# Altium PCB PCB.pcbdoc
Units mil, origin at the board's own origin, x right, y up, seen from the top; angles counter-clockwise.
Board outline 4573.5 x 6371.77 mil, 2 copper layers (Top Layer, Bottom Layer); 48 components, 32 nets, 161 pads, 63 vias.
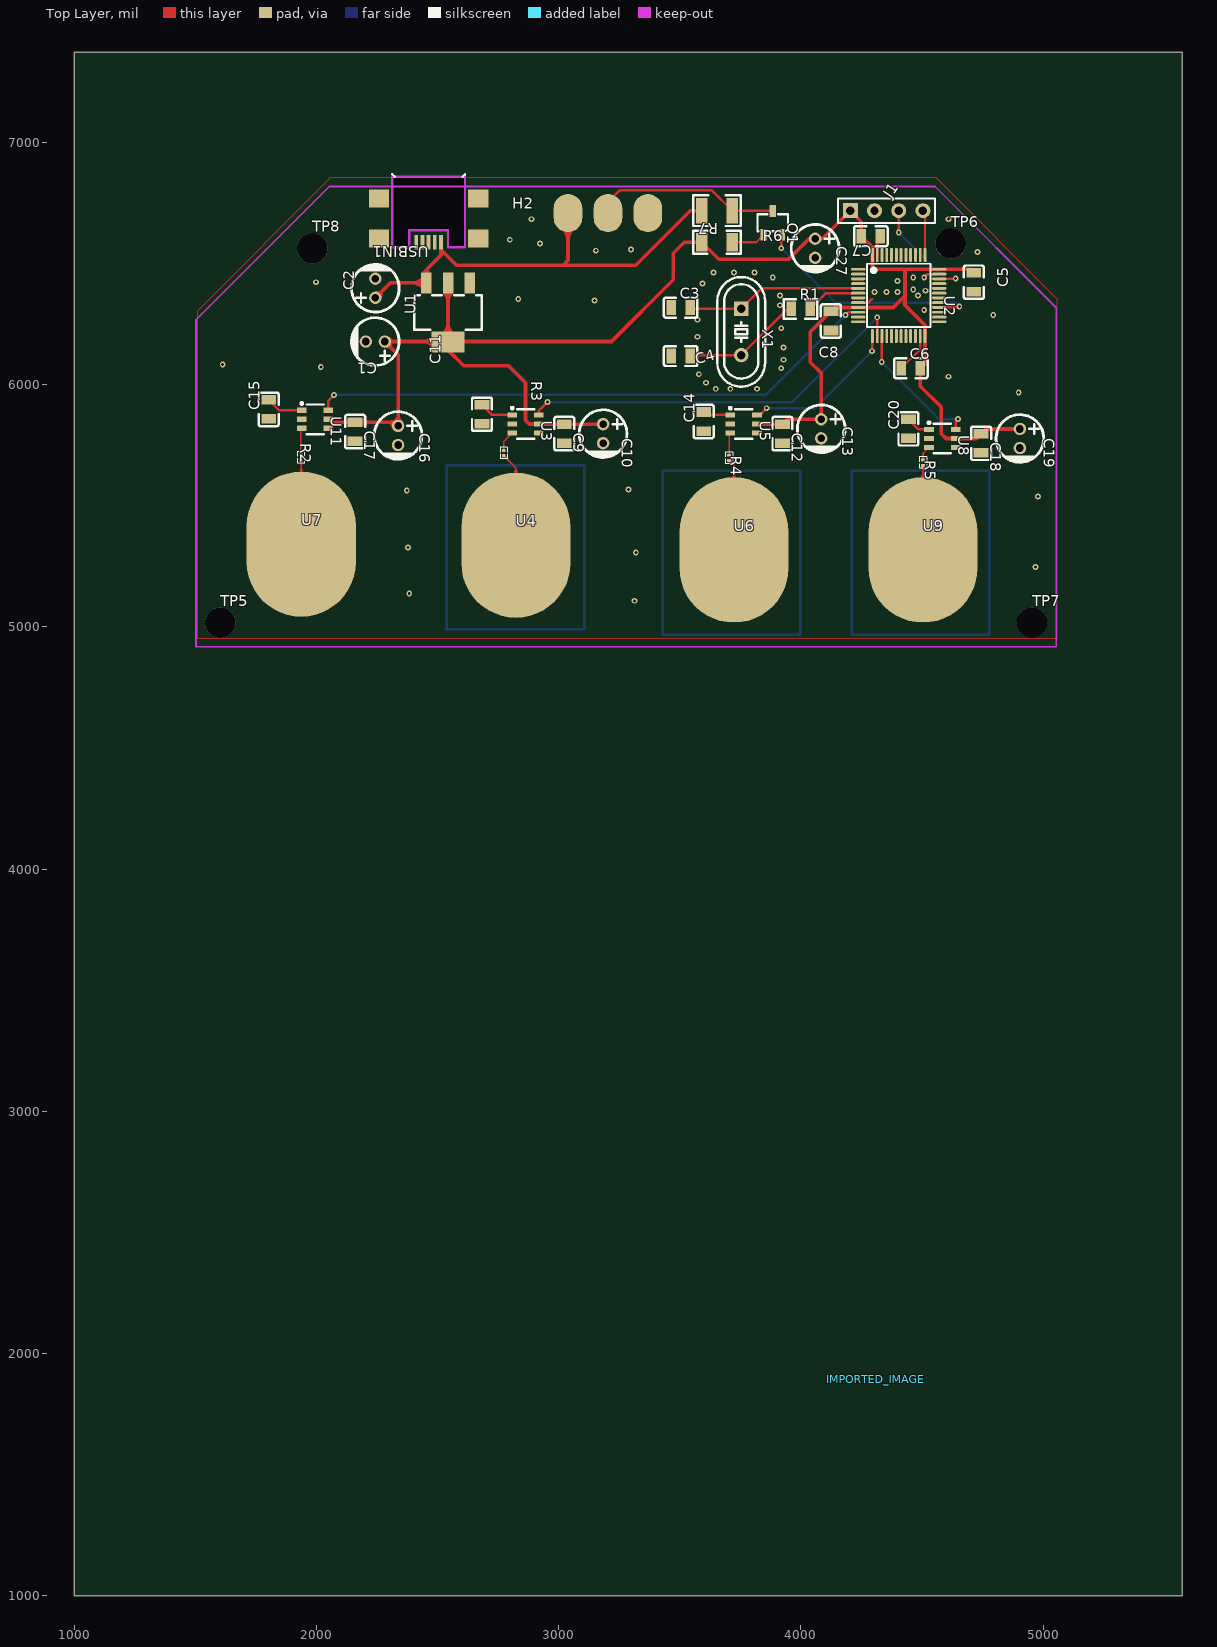
[diagram p0: Top Layer view]
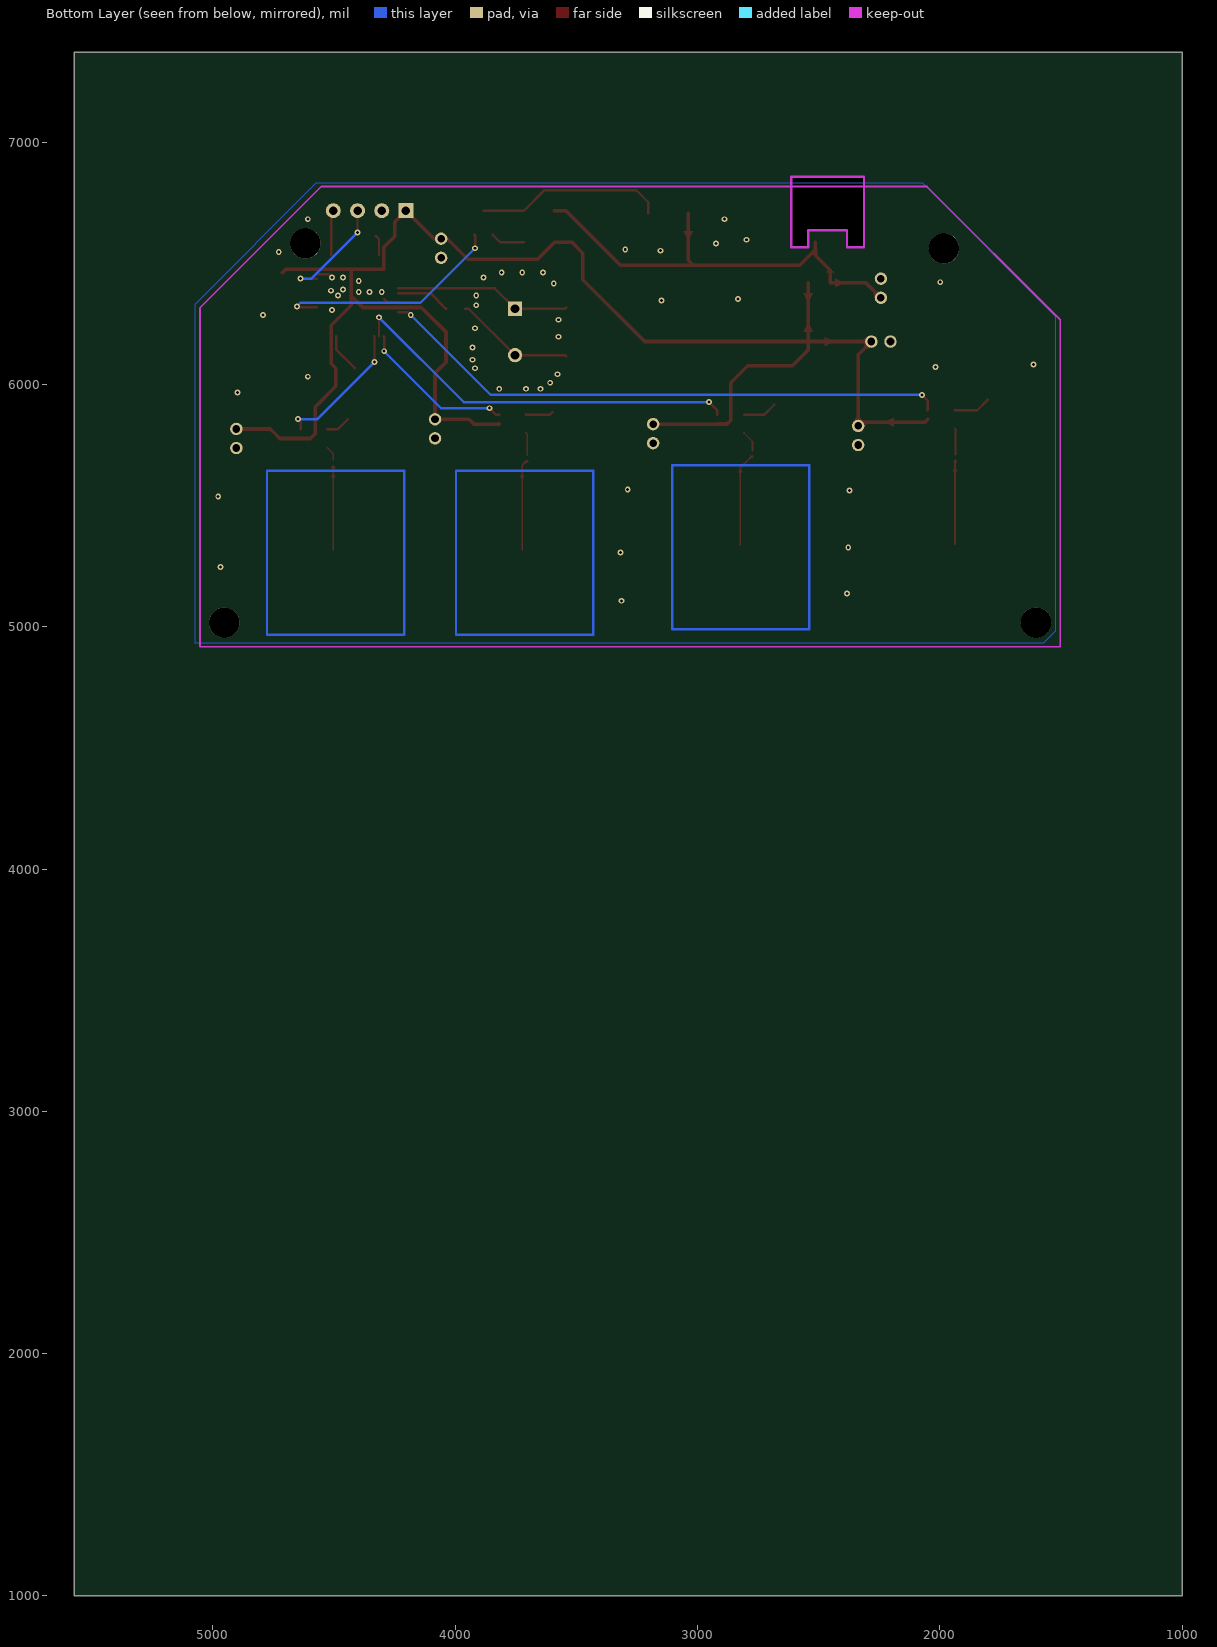
[diagram p1: Bottom Layer view, seen from below]

## Layer stack, top to bottom
Top Layer: signal copper (thickness not stored)
Dielectric: dielectric 12.6, FR-4, Dk 4.8
Bottom Layer: signal copper (thickness not stored)

## Board outline
5573.5,1000 1000,1000 1000,7371.77 5573.5,7371.77

## Components (designator, comment, footprint, x,y, rotation, side; value= is the part's Value field where it differs from the comment)
C1 "22uF" CAP-TH_BD5.0-P2.00-D0.8-FD 2243.5,6176.84 r180 top
C2 "10uF" CAP-TH_BD5.0-P2.00-D0.8-FD 2243.5,6396.84 r90 top
C3 "22pF" C0805 3503.5,6316.84 r0 top
C4 "22pF" C0805 3503.5,6116.84 r0 top
C5 "100nf" C0805 4713.5,6421.84 r90 top
C6 "100nf" C0805 4453.5,6066.84 r0 top
C7 "100nf" C0805 4288.5,6611.84 r180 top
C8 "100nf" C0805 4123.5,6261.84 r90 top
C9 "0.1u" C0805 3023.5,5796.84 r270 top
C10 "10uF" CAP-TH_BD5.0-P2.00-D0.8-FD 3183.5,5796.84 r270 top
C11 "47nf" C0805 2683.5,5876.84 r90 top
C12 "0.1u" C0805 3923.5,5796.84 r270 top
C13 "10uF" CAP-TH_BD5.0-P2.00-D0.8-FD 4083.5,5816.84 r270 top
C14 "47nf" C0805 3598.5,5846.84 r90 top
C15 "47nf" C0805 1803.5,5896.84 r90 top
C16 "10uF" CAP-TH_BD5.0-P2.00-D0.8-FD 2337.36,5789.27 r270 top
C17 "0.1u" C0805 2160.19,5805.02 r270 top
C18 "0.1u" C0805 4743.5,5756.84 r270 top
C19 "10uF" CAP-TH_BD5.0-P2.00-D0.8-FD 4903.5,5776.84 r270 top
C20 "47nf" C0805 4443.5,5816.84 r90 top
C27 "22uF" CAP-TH_BD5.0-P2.00-D0.8-FD 4058.5,6561.84 r270 top
H2 "HDR-F-2.54_1x3" 灯条接口 3203.5,6711.84 r0 top
IMPORTED_IMAGE "IMPORTED_IMAGE" IMPORTED_IMAGE 4308.16,1893.65 r0 top
J1 "HDR-M-2.54_1x4" HDR-M-2.54_1X4 4353.5,6716.84 r0 top
Q1 "2SC2412G" SOT-23-3_L3.0-W1.7-P0.95-LS2.9-BR 3883.5,6666.84 r270 top
R1 "390" R0805 3998.5,6311.84 r0 top
R2 "5K" R0201 1935.78,5698.72 r270 top
R3 "5K" R0201 2773.5,5716.84 r270 top
R4 "5K" R0201 3703.5,5696.84 r270 top
R5 "5K" R0201 4503.5,5676.84 r270 top
R6 "13K" R1206 3653.5,6586.84 r0 top
R7 "20K" R1210 3653.5,6716.84 r180 top
TP5 "M3铜柱" M3铜柱 1603.5,5016.84 r0 top
TP6 "M3铜柱" M3铜柱 4618.5,6581.84 r0 top
TP7 "M3铜柱" M3铜柱 4953.5,5016.84 r0 top
TP8 "M3铜柱" M3铜柱 1983.5,6561.84 r0 top
U1 "AMS1117_C400139" SOT-223-3_L6.5-W3.4-P2.30-LS7.0-BR 2543.5,6296.84 r90 top
U2 "MM32F103C8T6" LQFP-48_L7.0-W7.0-P0.50-LS9.0-BL 4403.5,6366.84 r270 top
U3 "RH6016CB" SOT-23-6_L2.9-W1.6-P0.95-LS2.8-BL 2863.5,5836.84 r270 top
U4 "触摸电极" 触摸电极 2823.5,5336.84 r0 top
U5 "RH6016CB" SOT-23-6_L2.9-W1.6-P0.95-LS2.8-BL 3763.5,5836.84 r270 top
U6 "触摸电极" 触摸电极 3723.5,5316.84 r0 top
U7 "触摸电极" 触摸电极 1937.83,5340.77 r0 top
U8 "RH6016CB" SOT-23-6_L2.9-W1.6-P0.95-LS2.8-BL 4583.5,5776.84 r270 top
U9 "触摸电极" 触摸电极 4503.5,5316.84 r0 top
U11 "RH6016CB" SOT-23-6_L2.9-W1.6-P0.95-LS2.8-BL 1994.84,5856.2 r270 top
USBIN1 "USB-Micro_2" MICRO-USB-SMD_5P_C40957 2463.5,6676.84 r180 top
X1 "8MHz" HC-49US_L11.5-W4.5-P4.88 3753.5,6216.84 r270 top

## Footprints (in the part's own frame and the unit in brackets; to place one, negate y for a bottom-side part, rotate by r counter-clockwise, add the part's x,y. Pads: shape width x height; smd on the part's side, far side on the other; paste and mask are expansions set on the pad)
C0805 [mm]
  rect 1x1.55 smd: 1(-1,0) 2(1,0)
  silkscreen extent -1.75,-1.04 1.75,1.04
CAP-TH_BD5.0-P2.00-D0.8-FD [mm]
  round 1.3 hole 0.8: 1(-1,0) 2(1,0)
  silkscreen extent -2.5,-2.5 2.5,2.5
HC-49US_L11.5-W4.5-P4.88 [mm]
  rect 1.5x1.5 hole 0.9: 1(-2.438,0)
  round 1.5 hole 0.9: 2(2.438,0)
  silkscreen extent -5.74,-2.5 5.74,2.5
HDR-M-2.54_1X4 [mil]
  rect 62x62 hole 35: 1(-150,0)
  round 62 hole 35: 2(-50,0) 3(50,0) 4(150,0)
  silkscreen extent -200,-50 200,50
IMPORTED_IMAGE [mil]
LQFP-48_L7.0-W7.0-P0.50-LS9.0-BL [mm]
  oval 0.3x1.5 smd: 1(-2.75,-4.25) 2(-2.25,-4.25) 3(-1.75,-4.25) 4(-1.25,-4.25) 5(-0.75,-4.25) 6(-0.25,-4.25) 7(0.25,-4.25) 8(0.75,-4.25) 9(1.25,-4.25) 10(1.75,-4.25) 11(2.25,-4.25) 12(2.75,-4.25) 25(2.75,4.25) 26(2.25,4.25) 27(1.75,4.25) 28(1.25,4.25) 29(0.75,4.25) 30(0.25,4.25) 31(-0.25,4.25) 32(-0.75,4.25) 33(-1.25,4.25) 34(-1.75,4.25) 35(-2.25,4.25) 36(-2.75,4.25)
  oval 1.5x0.3 smd: 13(4.25,-2.75) 14(4.25,-2.25) 15(4.25,-1.75) 16(4.25,-1.25) 17(4.25,-0.75) 18(4.25,-0.25) 19(4.25,0.25) 20(4.25,0.75) 21(4.25,1.25) 22(4.25,1.75) 23(4.25,2.25) 24(4.25,2.75) 37(-4.25,2.75) 38(-4.25,2.25) 39(-4.25,1.75) 40(-4.25,1.25) 41(-4.25,0.75) 42(-4.25,0.25) 43(-4.25,-0.25) 44(-4.25,-0.75) 45(-4.25,-1.25) 46(-4.25,-1.75) 47(-4.25,-2.25) 48(-4.25,-2.75)
  silkscreen extent -3.33,-3.31 3.3,3.34
M3铜柱 [mm]
  round 3.2 hole 3.2: 1(0,0)
MICRO-USB-SMD_5P_C40957 [mm]
  rect 0.4x1.524 smd: 1(-1.3,2.288) 2(-0.65,2.288) 3(0,2.288) 4(0.65,2.288) 5(1.3,2.288)
  rect 2.1x1.9 smd: 6(5.2,1.913) 7(5.2,-2.288) 8(-5.2,-2.288) 9(-5.2,1.913)
  Keep-Out Layer lines w0.254: 3.81,2.796 3.81,-4.57 -3.81,-4.57 -3.81,2.796 -2.032,2.794 -2.032,1.016 2.032,1.016 2.032,2.794 3.81,2.796
  Multi-Layer board cut-out: -3.81,-4.572 -3.81,2.794 -2.032,2.794 -2.032,1.016 2.032,1.016 2.032,2.794 3.81,2.794 3.81,-4.572 -3.81,-4.572
  silkscreen extent -3.81,-4.82 3.81,-4.57
R0201 [mm]
  rect 0.3x0.4 smd: 1(-0.275,0) 2(0.275,0)
  silkscreen extent -0.6,-0.38 0.6,0.38
R0805 [mm]
  rect 1x1.55 smd: 1(-1,0) 2(1,0)
  silkscreen extent -1.75,-1.02 1.75,1.02
R1206 [mm]
  rect 1.2x1.9 smd: 1(-1.6,0) 2(1.6,0)
  silkscreen extent -2.5,-1.2 2.5,1.2
R1210 [mm]
  rect 1.2x2.7 smd: 1(-1.6,0) 2(1.6,0)
  silkscreen extent -2.5,-1.6 2.5,1.6
SOT-23-3_L3.0-W1.7-P0.95-LS2.9-BR [mm]
  rect 1.25x0.7 smd: 1(1.25,-0.95) 2(1.25,0.95) 3(-1.25,0)
  silkscreen extent -0.9,-1.6 0.9,1.6
SOT-23-6_L2.9-W1.6-P0.95-LS2.8-BL [mm]
  rect 0.55x1 smd: 1(-0.95,-1.4) 2(0,-1.4) 3(0.95,-1.4) 4(0.95,1.4) 5(0,1.4) 6(-0.95,1.4)
  silkscreen extent -1.78,-1.52 1.55,0.9
SOT-223-3_L6.5-W3.4-P2.30-LS7.0-BR [mm]
  rect 2.2x1.1 smd: 1(3.099,-2.3) 2(3.099,0) 3(3.099,2.3)
  rect 2.2x3.5 smd: 4(-3.099,0)
  silkscreen extent -1.8,-3.55 1.8,3.55
灯条接口 [mm]
  oval 3x4 smd: 1(-4.191,-0.127) 2(0,-0.127) 3(4.191,-0.127)
触摸电极 [mil]
  oval 450x600 smd: 1(-0.01,0)

## Via types
v1: diameter 24, hole 12, Top Layer to Bottom Layer, 51 vias
v2: diameter 24.02, hole 12.01, Top Layer to Bottom Layer, 12 vias

## Nets (pads, with @x,y where several pads share a name; then routed paths per layer and width w, separated by ;. In a path a pad name is that pad's centre, name@x,y a point inside that pad or via, vN(x,y) a via of type N, cw(c..) or ccw(c..) an arc to the next point about the centre after c; other vN are vias at no path point)
C15_2: C15.2 U11.1 | length 153.9
  Top Layer w10: C15.2 1846.11,5893.6 U11.1
GND: C1.2 C2.2 C3.1 C4.1 C5.1 C6.1 C7.1 C8.1 C9.2 C10.2 C11.1 C12.2 C13.2 C14.1 C15.1 C16.2 C17.2 C18.2 C19.2 C20.1 C27.2 H2.3 J1.2 TP5.1 TP6.1 TP7.1 TP8.1 U1.1 U2.8 U2.23 U2.35 U2.44 U2.47 U3.2 U3.4 U5.2 U5.4 U8.2 U8.4 U11.2 U11.4 USBIN1.5 USBIN1.6 USBIN1.7 USBIN1.8 USBIN1.9 | length 379.3
  Top Layer w10: U2.8 4278.97,6337.31 4293.5,6351.84 ; U2.47 4314.92,6598.89 C7.1 ; C6.1 4492.08,6144.78 U2.23 ; v1(4508.5,6441.84) 4522.08,6455.41 U2.35
  other v1: 3313.5,5106.84 2383.5,5136.84 4968.5,5246.84 3318.5,5306.84 2378.5,5326.84 4978.5,5536.84 2373.5,5561.84 3288.5,5566.84 4898.5,5966.84 3648.5,5981.84 3708.5,5981.84 3818.5,5981.84 3608.5,6006.84 4608.5,6031.84 3578.5,6041.84 3918.5,6066.84 2018.5,6071.84 1613.5,6081.84 3928.5,6101.84 3928.5,6151.84 3573.5,6196.84 3918.5,6231.84 3573.5,6266.84 4793.5,6286.84 4508.5,6306.84 3913.5,6326.84 3148.5,6346.84 2833.5,6351.84 3913.5,6366.84 4483.5,6366.84 4303.5,6381.84 4353.5,6381.84 4398.5,6381.84 4513.5,6386.84 4463.5,6391.84 3593.5,6416.84 1998.5,6421.84 4398.5,6426.84 3883.5,6441.84 4463.5,6441.84 3638.5,6461.84 3723.5,6461.84 3808.5,6461.84 4728.5,6546.84 3153.5,6551.84 3298.5,6556.84 2923.5,6581.84 2798.5,6596.84 2888.5,6681.84 4608.5,6681.84
LED_DATA: H2.2 Q1.3 R7.1 | length 781.3
  Top Layer w10: H2.2 3203.5,6751.84 3253.5,6801.84 3631.5,6801.84 R7.1 3882.7,6716.84 Q1.3
LED_DATA_RAW: Q1.2 U2.28 | length 980.6
  Top Layer w10: v2(3918.5,6561.84) 3918.5,6615.23 Q1.2 ; U2.28 4649.29,6317.62 v2(4653.5,6321.84)
  Bottom Layer w10: v2(3918.5,6561.84) 4143.5,6336.84 4638.5,6336.84 v2(4653.5,6321.84) v2@4658.5,6321.84
Q1_1: Q1.1 R6.2 | length 142.4
  Top Layer w10: R6.2 3815.3,6586.84 Q1.1
R2_1: R2.1 U11.3 | length 110.9
  Top Layer w7: R2.1@1935.78,5709.55 1935.78,5814.86 U11.3
R2_2: R2.2 U7.1 | length 348
  Top Layer w7: R2.2 1937.8,5685.84 U7.1@1937.8,5340.73
S$3086: 
S$3088: 
S$3750: 
S$3754: 
S$5089: 
SENSOR2: U2.13 U5.6 | length 652.1
  Top Layer w10: U5.6 3830.9,5874.23 v2(3858.5,5901.84) ; v2@4293.5,6131.84 4293.5,6197.78 U2.13
  Bottom Layer w10: v2(3858.5,5901.84) 4058.27,5901.84 v2(4293.5,6137.06)
SENSOR3: U2.14 U3.6 | length 1650.8
  Top Layer w10: U3.6 2918.62,5891.95 v2(2953.5,5926.84) ; U2.14 v2(4314.92,6276.84)
  Bottom Layer w10: v2(2953.5,5926.84) 3964.92,5926.84 v2(4314.92,6276.84)
SENSOR4: U2.15 U8.6 | length 567.2
  Top Layer w10: v2(4333.5,6091.84) 4333.5,6198.41 U2.15 ; U8.6 4638.62,5846.95 v2(4648.5,5856.84)
  Bottom Layer w10: v2(4333.5,6091.84) 4568.5,5856.84 v2(4648.5,5856.84)
SWCLK: J1.4 U2.37 | length 186.1
  Top Layer w10: J1.4 4511.77,6708.56 U2.37
SWDIO: J1.3 U2.34 | length 471.8
  Top Layer w10: v2(4403.5,6626.84) J1.3 ; U2.34 4637.4,6435.73 v2(4638.5,6436.84)
  Bottom Layer w10: v2(4403.5,6626.84) 4593.5,6436.84 v2(4638.5,6436.84)
U2_5: C3.2 U2.5 X1.1 | length 729.6
  Top Layer w10: C3.2 3546.87,6312.84 X1.1 3837.03,6396.36 U2.5
U2_6: R1.2 U2.6 | length 225.2
  Top Layer w10: R1.2 4102.71,6376.67 U2.6
U3_1: C11.2 U3.1 | length 142.3
  Top Layer w10: C11.2 2725.47,5874.23 U3.1
U3_3: R3.1 U3.3 | length 86.2
  Top Layer w7: R3.1 2773.5,5764.56 U3.3
U4_1: R3.2 U4.1 | length 389.9
  Top Layer w7: R3.2 2823.5,5656.03 U4.1
U5_1: C14.2 U5.1 | length 114.8
  Top Layer w10: C14.2 3610.47,5874.23 U5.1
U5_3: R4.1 U5.3 | length 93.8
  Top Layer w7: R4.1 3703.5,5794.56 U5.3
U6_1: R4.2 U6.1 | length 377.5
  Top Layer w7: R4.2 3723.5,5666.03 U6.1
U8_1: C20.2 U8.1 | length 102.3
  Top Layer w10: C20.2 4485.47,5814.23 U8.1
U8_3: R5.1 U8.3 | length 62.1
  Top Layer w7: R5.1@4503.5,5687.64 4503.5,5714.53 4507.8,5718.94 U8.3
U9_1: R5.2 U9.1 | length 349.2
  Top Layer w7: U9.1 R5.2
VCC3.3: C1.1 C5.2 C6.2 C7.2 C8.2 C9.1 C10.1 C12.1 C13.1 C16.1 C17.1 C18.1 C19.1 C27.1 J1.1 R6.1 U1.2 U1.4 U2.9 U2.24 U2.36 U2.48 U3.5 U5.5 U8.5 U11.5 | length 6985.2
  Top Layer w15: U11.5 2061.77,5844.39 C17.1 ; C17.1 2321.6,5844.44 C16.1 ; C1.1 2337.36,6122.34 C16.1 ; C1.1 2541.5,6176.84 U1.4 ; U1.2 U1.4 ; C9.1 C10.1 ; C9.1 U3.5 2878.5,5836.84 2863.5,5851.84 2863.5,6006.84 2793.5,6076.84 2608.5,6076.84 2543.5,6141.84 U1.4 ; U5.5 C12.1 ; C12.1 3943.5,5856.2 C13.1 ; C13.1 4083.5,6046.84 4038.5,6091.84 4038.5,6216.23 C8.2 ; C8.2 4139.92,6317.62 U2.9 ; U2.9 4381.1,6317.64 4429.2,6365.34 ; C7.2 4295.2,6565.73 4295.2,6534.14 4295.2,6475.64 U2.36 ; C7.2 4249.13,6671.2 J1.1 4087.87,6601.2 C27.1 4032.87,6601.2 3948.5,6516.84 3660.5,6516.84 R6.1 3518.5,6586.84 3473.5,6541.84 3473.5,6431.84 3218.5,6176.84 2545.5,6176.84 U1.4 ; 4429.22,6475.39 4429.22,6326.12 4511.77,6243.56 U2.24 4511.77,6085.73 C6.2 4492.87,5992.47 4578.5,5906.84 4578.5,5796.84 4598.5,5776.84 U8.5 4724.13,5776.84 C18.1 4763.5,5816.2 C19.1 ; U2.36 4699.6,6475.1 C5.2
VCC5: C2.1 H2.1 R7.2 U1.3 USBIN1.1 | length 1889.1
  Top Layer w15: C2.1@2243.5,6357.44 2304.9,6418.84 U1.3 2452.9,6471.23 2514.7,6533.03 2514.7,6586.73 2514.7,6555.64 2578.5,6491.84 3018.5,6491.84 3038.5,6511.84 H2.1 ; 3007.58,6491.84 3318.5,6491.84 3543.5,6716.84 R7.2
WKUP: U2.10 U11.6 | length 2384.2
  Top Layer w10: U11.6 2049.96,5933.29 v2(2073.5,5956.84) ; v2@4178.5,6281.84 4194.6,6297.94 U2.10
  Bottom Layer w10: v2(2073.5,5956.84) 3853.5,5956.84 v2(4183.63,6286.97)
X1_2: C4.2 R1.1 X1.2 | length 497
  Top Layer w10: C4.2 3546.87,6120.83 X1.2 3944.5,6311.84 R1.1
pads on no net: U2.1 U2.2 U2.3 U2.4 U2.7 U2.11 U2.12 U2.16 U2.17 U2.18 U2.19 U2.20 U2.21 U2.22 U2.25 U2.26 U2.27 U2.29 U2.30 U2.31 U2.32 U2.33 U2.38 U2.39 U2.40 U2.41 U2.42 U2.43 U2.45 U2.46 USBIN1.2 USBIN1.3 USBIN1.4
copper on no net: | length 7464.6
  Bottom Layer w10: 2538.5,4989.66 3105.43,4989.66 3105.43,5666.84 2538.5,5666.84 2538.5,4989.66 ; 3430.11,4966.11 3997.04,4966.11 3997.04,5643.28 3430.11,5643.28 3430.11,4966.11 ; 4210.11,4966.11 4777.04,4966.11 4777.04,5643.28 4210.11,5643.28 4210.11,4966.11

## Polygon pours and split planes (outlines as drawn)
GND on Bottom Layer (solid): 2073.5,6831.84 1523.5,6281.84 1523.5,4981.84 1573.5,4931.84 5073.5,4931.84 5073.5,6331.84 4573.5,6831.84 4323.5,6831.84
GND on Top Layer (solid): 2058.5,6851.84 1508.5,6301.84 1508.5,4951.84 5058.5,4951.84 5058.5,6351.84 4558.5,6851.84 2958.5,6851.84

## Other copper
Top Layer:
  pour cut-out net U2_5: 3698.5,6441.84 3798.5,6441.84 3848.5,6441.84 3898.5,6391.84 3898.5,6041.84 3848.5,5991.84 3648.5,5991.84 3598.5,6041.84 3598.5,6391.84 3648.5,6441.84 3748.5,6441.84
  pour cut-out net U8_3: 4153.5,5066.84 4153.5,5516.84 4303.5,5666.84 4473.5,5666.84 4478.5,5671.84 4478.5,5751.84 4478.5,5756.84 4478.5,5751.84 4498.5,5756.84 4573.5,5756.84 4573.5,5696.84 4603.5,5666.84 4753.5,5666.84 4903.5,5516.84 4903.5,5116.84 4903.5,5066.84 4803.5,4966.84 4253.5,4966.84 4203.5,5016.84 4153.5,5066.84
  pour cut-out net R2_2: 3643.5,5816.84 3643.5,5716.84 3493.5,5716.84 3393.5,5616.84 3393.5,5116.84 3543.5,4966.84 3943.5,4966.84 4093.5,5116.84 4093.5,5616.84 3993.5,5716.84 3843.5,5716.84 3843.5,5766.84 3793.5,5766.84 3793.5,5816.84 3793.5,5766.84 3793.5,5816.84
  pour cut-out net R2_2: 2723.5,5816.84 2723.5,5716.84 2573.5,5716.84 2473.5,5616.84 2473.5,5116.84 2623.5,4966.84 3023.5,4966.84 3173.5,5116.84 3173.5,5616.84 3073.5,5716.84 2923.5,5716.84 2923.5,5766.84 2873.5,5766.84 2873.5,5816.84 2873.5,5766.84 2873.5,5816.84
  pour cut-out net R2_2: 1853.5,5831.84 1853.5,5731.84 1703.5,5731.84 1603.5,5631.84 1603.5,5131.84 1753.5,4981.84 2153.5,4981.84 2303.5,5131.84 2303.5,5631.84 2203.5,5731.84 2053.5,5731.84 2053.5,5781.84 2003.5,5781.84 2003.5,5831.84 2003.5,5781.84 2003.5,5831.84
  region net U4_1: 2781.38,5707.03 2765.62,5700.11 2779.73,5694.83 2786.61,5697.86
  region net U4_1: 2832.25,5636.66 2814.75,5636.66 2820,5647.16 2827,5647.16
  region net U9_1: 4512.25,5616.66 4494.75,5616.66 4500,5627.16 4507,5627.16
  region net U9_1: 4511.38,5660.11 4495.62,5660.11 4500,5649.61 4507,5649.61
  region net U6_1: 3732.25,5616.66 3714.75,5616.66 3720,5627.16 3727,5627.16
  region net U6_1: 3711.38,5687.03 3695.62,5680.11 3709.73,5674.83 3716.61,5677.86
  region net VCC5: 3057.25,6631.15 3019.75,6631.15 3031,6608.65 3046,6608.65
  region net VCC5: 2522.56,6556.77 2506.81,6556.77 2507.19,6555.65 2522.19,6555.65
  region net VCC5: 2431.29,6400.08 2431.29,6437.58 2408.79,6426.33 2408.79,6411.33
  region net VCC5: 2241.9,6383.01 2269.04,6355.86 2273.44,6376.8 2262.83,6387.4
  region net VCC5: 2522.56,6556.77 2506.81,6556.77 2507.19,6534.27 2522.19,6534.27
  region net VCC5: 2434.2,6462.14 2471.7,6462.14 2460.45,6471.28 2445.45,6471.28
  region net VCC3.3: 2190.71,5863.14 2190.71,5825.64 2213.21,5836.89 2213.21,5851.89
  region net VCC3.3: 2330.94,5853.41 2313.59,5819.17 2302.49,5836.89 2310.09,5851.89
  region net VCC3.3: 2356.56,5845.57 2318.17,5845.57 2329.86,5863.48 2344.86,5863.48
  region net VCC3.3: 2281.27,6151.29 2308.41,6178.44 2312.81,6157.5 2302.2,6146.9
  region net VCC3.3: 2474.6,6158.09 2474.6,6195.59 2452.1,6184.34 2452.1,6169.34
  region net VCC3.3: 2299.8,6157.64 2299.8,6196.03 2317.71,6184.34 2317.71,6169.34
  region net VCC3.3: 2562.25,6375.53 2524.75,6375.53 2536,6353.03 2551,6353.03
  region net VCC3.3: 2524.75,6218.14 2562.25,6218.14 2551,6240.64 2536,6240.64
  region net R2_2: 1946.58,5640.6 1929.08,5640.6 1934.33,5651.1 1941.33,5651.1
  region net R2_2: 1943.66,5681.99 1929.08,5681.99 1934.33,5671.49 1941.33,5671.49
Bottom Layer:
  pour cut-out net R2_2: 1653.5,5616.84 1653.5,5166.84 1853.5,4966.84 2053.5,4966.84 2253.5,5166.84 2253.5,5616.84 2203.5,5666.84 1703.5,5666.84 1653.5,5616.84